# Altium PCB PCB2.PcbDoc
Units mm, origin at the board's own origin, x right, y up, seen from the top; angles counter-clockwise.
Board outline 150 x 100 mm, 2 copper layers (Top Layer, Bottom Layer); 50 components, 33 nets, 115 pads, 4 vias.
Unrouted connection lines stored in the file: 2.
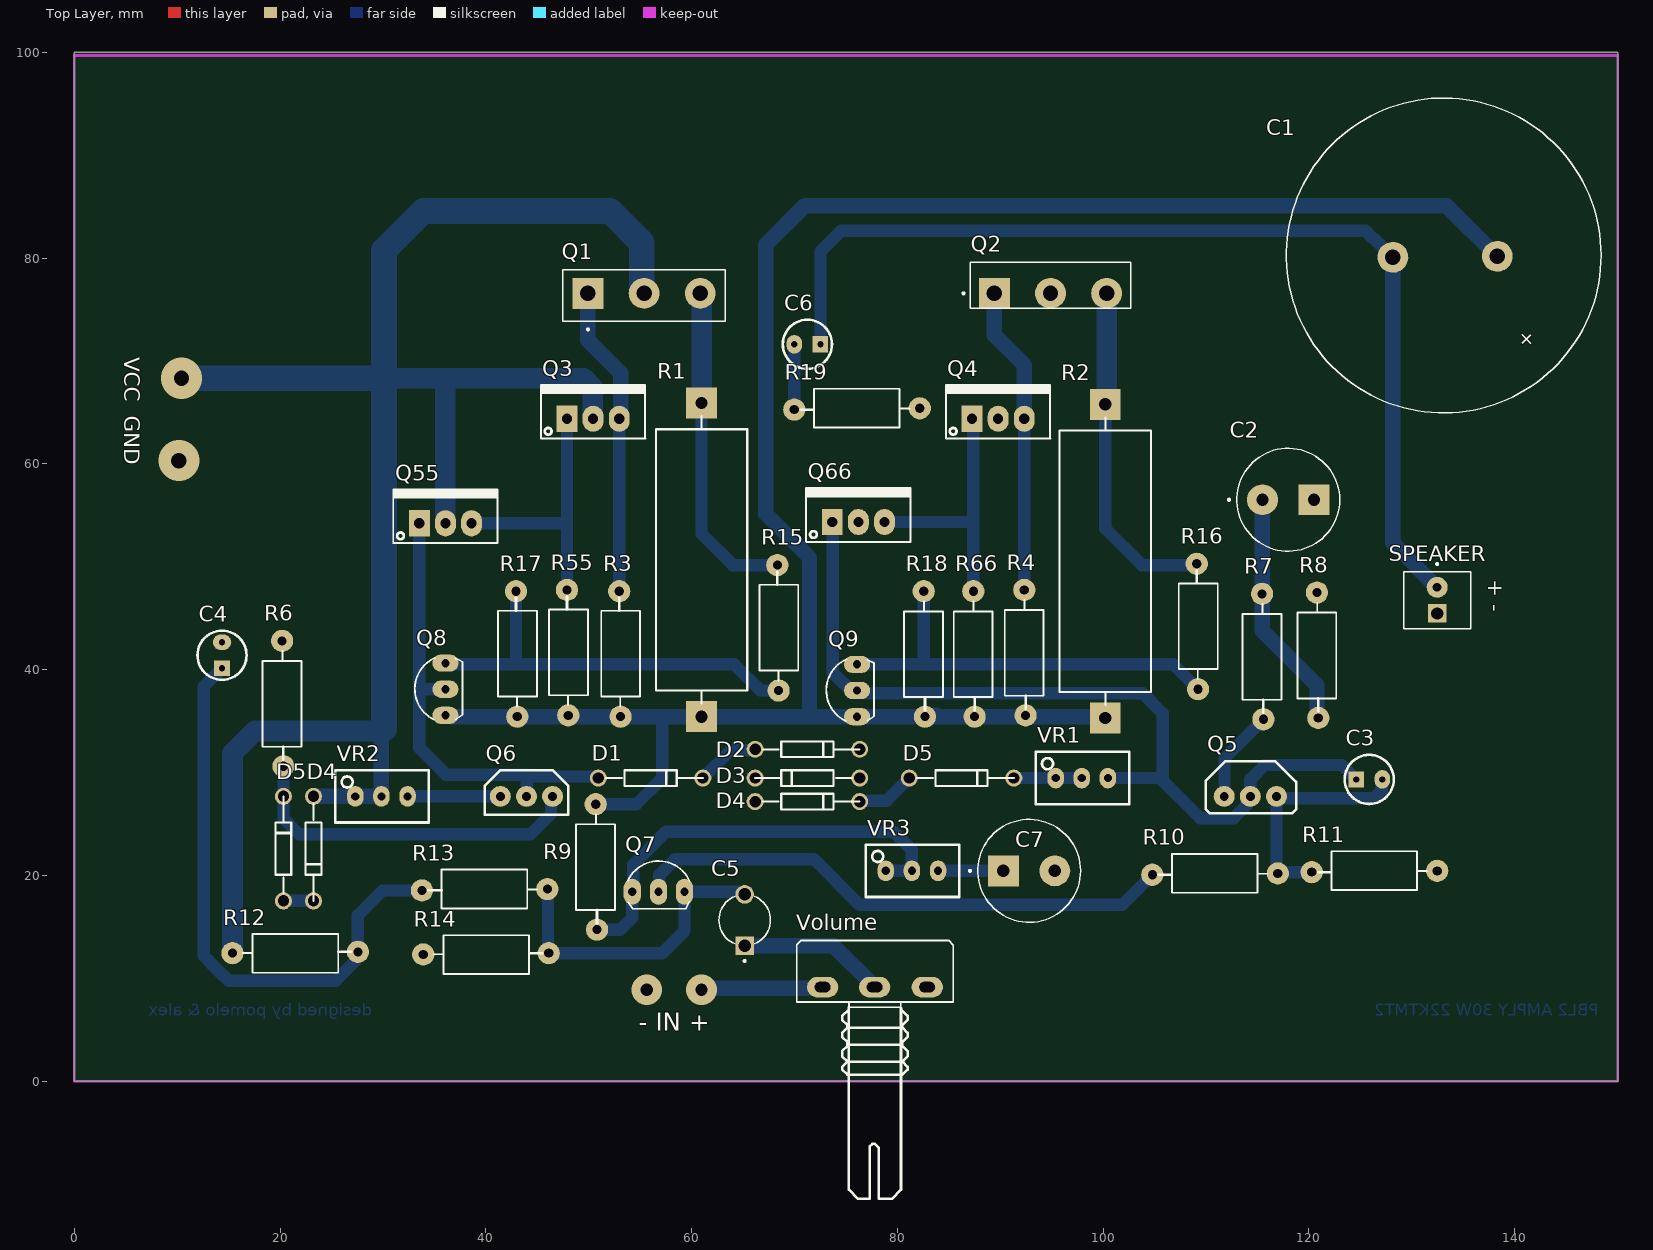
[diagram p0: Top Layer view]
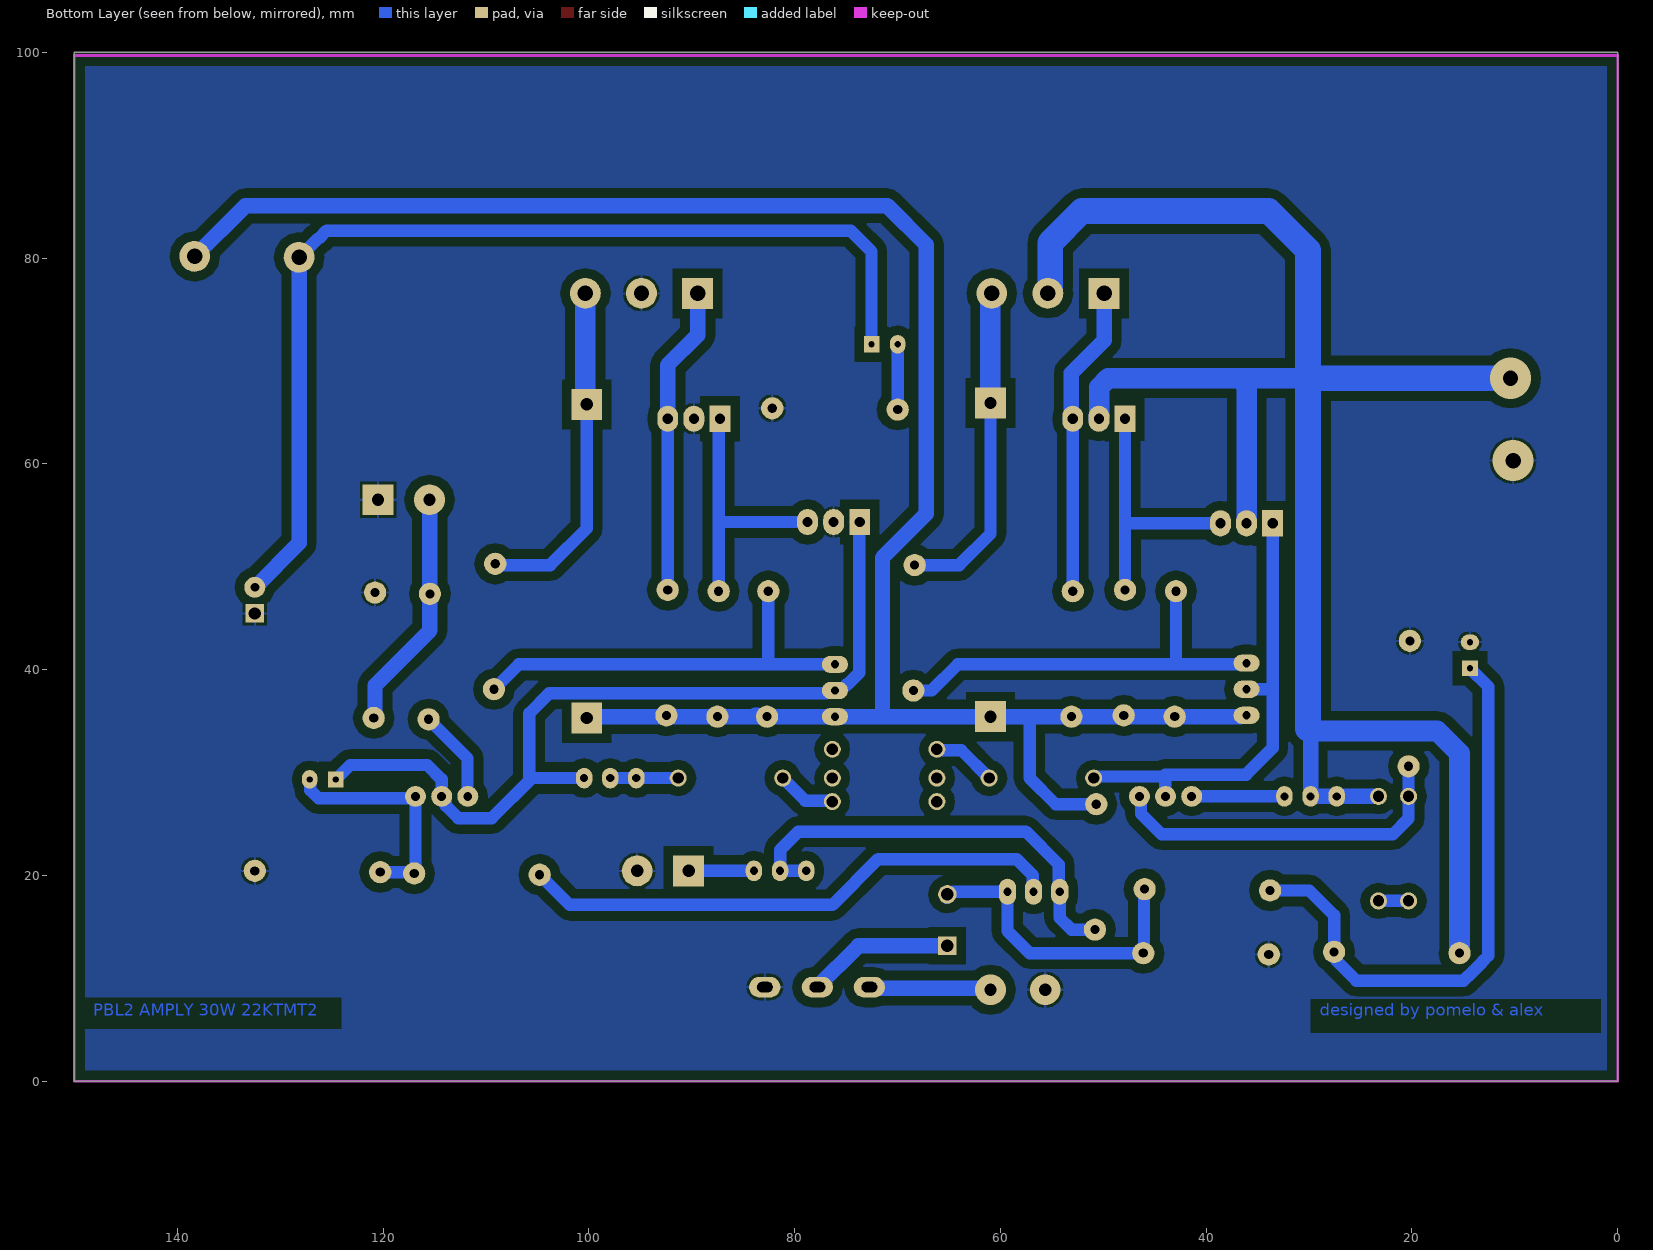
[diagram p1: Bottom Layer view, seen from below]
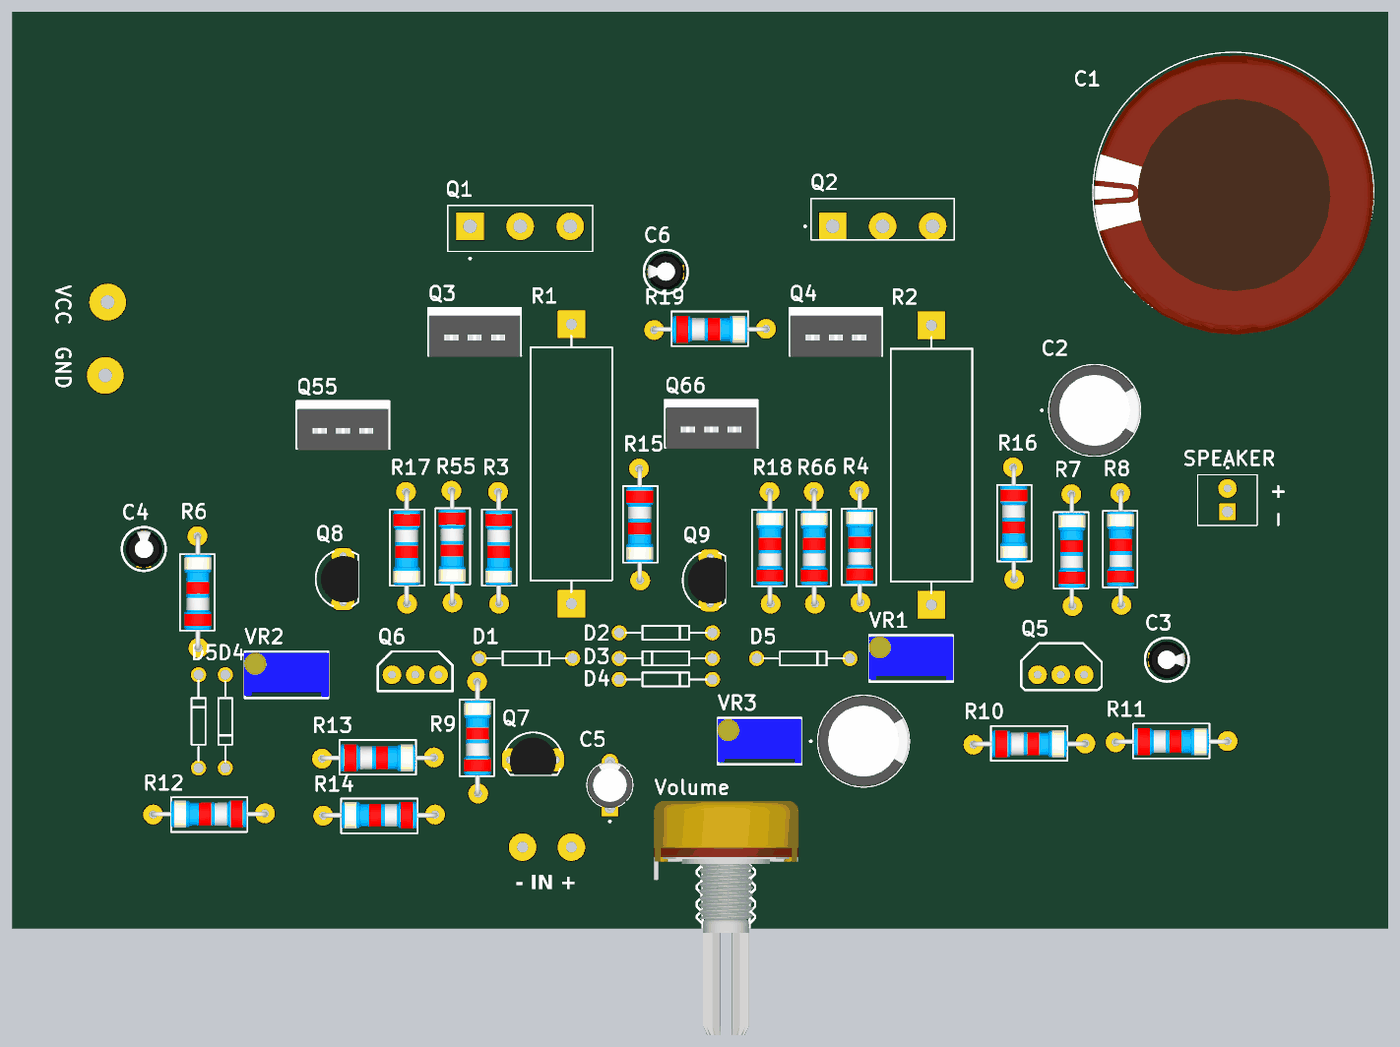
[diagram p2: 3D render of the assembled board from above, using the file's embedded part models]

## Layer stack, top to bottom
Top Solder: solder mask 0.0102, Solder Resist, Dk 3.5
Top Layer: signal copper 0.0356
Dielectric 1: dielectric 0.32, FR-4, Dk 4.8
Bottom Layer: signal copper 0.0356
Bottom Solder: solder mask 0.0102, Solder Resist, Dk 3.5

## Board outline
0,0 150,0 150,100 0,100

## Design rules (kind name [scope] priority, off if disabled: settings)
Clearance Clearance_1 [All] p1: gap=0.9 ignorepadtopadclearanceinfootprint=FALSE
PolygonConnect [All] p1: connectstyle=Relief reliefconductorwidth=0.254 reliefentries=4 polygonreliefangle="90 Angle" airgapwidth=0.254
RoutingVias [All] p1: holewidth=0.711 width=1.27 viastyle="Through Hole" minholewidth=0.711 minwidth=1.27 maxholewidth=0.711 maxwidth=1.27
SolderMaskExpansion [All] p1: expansion=0.102 istentingtop=FALSE
Width GND [InNet('GND')] p1: maxlimit=2.5 minlimit=1.5 preferedwidth=2
Width VCC [InNet('VCC')] p2: maxlimit=2.5 minlimit=1.5 preferedwidth=2
Width [All] p3: maxlimit=1.5 minlimit=0.8 preferedwidth=1.2
30 further rules are at their usual default settings.

## Components (designator, comment, footprint, x,y, rotation, side; value= is the part's Value field where it differs from the comment)
C1 "CN-ALU-DIP" CA-ALU-30 133.096,80.264 r134 top value=104 (schematic designator C?)
C2 "EEUTA1H101" CAPPRD500W60D1000H1250#1 117.983,56.515 r0 top
C3 "100p" CA-ALU-2.54 125.857,29.337 r0 top value=104
C4 "CN-ALU-DIP" CA-ALU-2.54 14.351,41.402 r90 top value=104
C5 "EEUHD1HR10B" CAPPRD500W50D500H1100 65.151,15.661 r90 top
C6 "CN-ALU-DIP" CA-ALU-2.54 71.247,71.628 r180 top value=104
C7 "EEUTA1H101" CAPPRD500W60D1000H1250#2 92.797,20.447 r0 top
D1 "DIODE" diode 56.007,29.464 r0 top
D2 "DIODE" diode 71.247,32.258 r0 top
D3 "DIODE" diode 71.247,29.464 r180 top
D4 "DIODE" diode 71.247,27.178 r0 top
D4 "DIODE" diode 23.241,22.606 r270 top
D5 "DIODE" diode 20.32,22.606 r90 top
D5 "DIODE" diode 86.233,29.464 r0 top
Q1 "2SD718" TO546P1579X502X2688-3 55.373,76.581 r0 top
Q2 "2SB688" TO545P1560X450X2320-3 89.43,76.581 r0 top
Q3 "TIP41C" TO220-123 47.879,64.389 r0 top
Q4 "TIP42C" TO220-123 87.249,64.389 r0 top
Q5 "C2383" C2383 114.3,27.686 r0 top
Q6 "A1013" A1013 43.942,27.686 r0 top
Q7 "2SA1015" TO92-123 56.769,18.415 r0 top value=A1015
Q8 "2SC1815" TO92-123 36.068,38.1 r90 top value=C1815
Q9 "2SA1015" TO92-123 76.073,37.973 r90 top value=A1015
Q55 "TIP41C" TO220-123 33.528,54.229 r0 top
Q66 "TIP42C" TO220-123 73.66,54.356 r0 top
R1 "5W Res Power" "DIEN TRO 5W" 60.96,35.433 r90 top
R2 "5W Res Power" "DIEN TRO 5W" 100.203,65.786 r270 top
R3 "220" RES-1/2W 53.086,42.037 r270 top
R4 "220" RES-1/2W 92.329,41.148 r90 top
R6 "Res" RES-1/2W 20.193,36.195 r90 top
R7 "62" RES-1/2W 115.443,40.767 r90 top
R8 "100" RES-1/2W 120.777,40.894 r90 top
R9 "3k" RES-1/2W 50.673,20.32 r90 top
R10 "Res" RES-1/2W 110.363,20.193 r0 top
R11 "Res" RES-1/2W 125.857,20.447 r0 top
R12 "560k" RES-1/2W 21.971,12.446 r180 top
R13 "220k" RES-1/2W 39.37,18.669 r0 top
R14 "560k" RES-1/2W 40.513,12.319 r180 top
R15 "2k" RES-1/2W 68.453,44.577 r270 top
R16 "2k" RES-1/2W 109.22,44.704 r270 top
R17 "2k" RES-1/2W 43.053,42.037 r270 top
R18 "2k" RES-1/2W 82.55,41.021 r90 top
R19 "Res" RES-1/2W 75.565,65.405 r0 top
R55 "220" RES-1/2W 48.006,42.164 r270 top
R66 "220" RES-1/2W 87.376,41.021 r90 top
SPEAKER "282834-2" TE_282834-2 132.461,46.736 r270 top
Volume "1k" VR-S1 77.81,9.144 r0 top value="Volume 50k"
VR1 "50" RVAR10K 97.917,29.464 r0 top value="VR 10K"
VR2 "200" RVAR10K 29.845,27.686 r0 top value="VR 10K"
VR3 "50" RVAR10K 81.407,20.447 r0 top value="VR 10K" (schematic designator VR?)

## Footprints (in the part's own frame and the unit in brackets; to place one, negate y for a bottom-side part, rotate by r counter-clockwise, add the part's x,y. Pads: shape width x height; smd on the part's side, far side on the other; paste and mask are expansions set on the pad)
A1013 [mil]
  round 80 hole 34: 1(-100,0) 2(0,0) 3(100,0)
  silkscreen extent -160,-70 160,100
C2383 [mil]
  round 80 hole 34: 1(-100,0) 2(0,0) 3(100,0)
  silkscreen extent -170,-65 175,135
CA-ALU-2.54 [mm]
  rect 1.5x1.58 hole 0.6: 1(-1.27,0)
  oval 1.5x1.8 hole 0.6: 2(1.27,0)
  silkscreen extent -2.39,-2.39 2.39,2.39, body extent -2,-2.03 1.99,1.97, height 7.01
CA-ALU-30 [mm] "Polarized capacitors, Aluminum Electrolytic Capacitors, 2-Leads, Body 22x41x10x0.8"
  round 3 hole 1.5: 1(-3.683,-3.683) 2(3.302,3.683)
  silkscreen extent -15.3,-15.3 15.3,15.3, body extent -21.81,-21.43 21.3,21.68, height 5.59
CAPPRD500W50D500H1100 [mm]
  round 1.8 hole 1.2: N(2.5,0)
  rect 1.8x1.8 / inner round 1.8 / far side rect 1.8x1.8 hole 1.2: P(-2.5,0)
  silkscreen extent -4.06,-2.5 2.32,2.5, body extent -2.75,-2.5 2.75,2.5, height 11
CAPPRD500W60D1000H1250#1 [mm]
  rect 3x3 hole 1.2: N(2.5,0)
  round 3 hole 1.2: P(-2.5,0)
  silkscreen extent -5.85,-5 5,5, body extent -5,-5 5,5, height 12.5
CAPPRD500W60D1000H1250#2 [mm]
  round 3 hole 1.2 mask-2539.97: N(2.5,0)
  rect 3x3 hole 1.2: P(-2.5,0)
  silkscreen extent -5.85,-5 5,5, body extent -5,-5 5,5, height 12.5
"DIEN TRO 5W" [mm]
  rect 3x3 hole 1.2: 1(0,0) 2(30.48,0)
  silkscreen extent 1.27,-4.44 29.21,4.45, body extent 2.54,-4.44 27.94,4.45, height 7.62
diode [mil] "Diode"
  round 65 hole 43.31: 1(-200,0) 2(200,0)
  silkscreen extent -170,-30 200,30
RES-1/2W [mil]
  round 85 hole 35: 1(-220,-5) 2(260,0)
  silkscreen extent -195,-74 221,75, body extent -230,-60 270,56, height 121
RVAR10K [mm] "Bien tro vi chinh"
  oval 1.6x2 hole 0.8: 1(-2.54,0) 2(0,0) 3(2.54,0)
  silkscreen extent -4.47,-2.54 4.6,2.54, body extent -4.54,-2.4 4.66,2.4, height 12.02
TE_282834-2 [mm]
  round 2.032 hole 0.864: 1(-1.27,0)
  rect 1.8x1.8 / inner round 1.8 / far side rect 1.8x1.8 hole 1.2: 2(1.27,0)
  silkscreen extent -3.62,-3.25 2.77,3.25
TO92-123 [mil] "TO-92"
  oval 66x100 hole 32: 1(-100,0) 2(0,0) 3(100,0)
  silkscreen extent -117,-65 120,118, body extent -109,-66 109,95, height 245
TO220-123 [mil] "TO-220 - 1-2-3"
  rect 80x100 hole 39: 1(0,0)
  oval 80x100 hole 39: 2(100,0) 3(200,0)
  silkscreen extent -100,-76 300,130, body extent -95,-80 295,97, height 323
TO545P1560X450X2320-3 [mm]
  rect 3x3 hole 1.5: 1(0,0)
  round 3 hole 1.5: 2(5.45,0) 3(10.9,0)
  silkscreen extent -3.1,-1.47 13.25,3.03
TO546P1579X502X2688-3 [mm]
  rect 3x3 hole 1.5: 1(-5.46,0)
  round 3 hole 1.5: 2(0,0) 3(5.46,0)
  silkscreen extent -7.9,-3.6 7.9,2.29
VR-S1 [mil]
  oval 120x78.74 hole 40 slot 60 at 0 deg: 1(-200,0) 2(-1,0) 3(200,0)
  silkscreen extent -299,-810 300,179, body extent -310,-818 310,188, height 839

## Part data
C1 C4 C6: "Capacitor (Semiconductor SIM Model)", LatestRevisionDate=17-Jul-2002, LatestRevisionNote="Re-released for DXP Platform.", PackageReference=C1206, Publisher="Altium Limited"
C2 C7: "Cap Aluminum Lytic 100uF 50V 20% (10 X 12.5mm) Radial 5mm 555mA 2000h 125Â°C Automotive Bulk", Package="RADIAL-2 Panasonic", Check_prices=https://www.snapeda.com/parts/EEUTA1H101/Panasonic/view-part/2305858/?ref=eda, Digi-Key_Part_Number=10-EEU-TA1H101BCT-ND, MF=Panasonic, MP=EEUTA1H101, SnapEDA_Link=https://www.snapeda.com/parts/EEUTA1H101/Panasonic/view-part/2305858/?ref=snap
C3: library part CN-ALU-DIP, "Capacitor (Semiconductor SIM Model)", LatestRevisionDate=17-Jul-2002, LatestRevisionNote="Re-released for DXP Platform.", PackageReference=C1206, Publisher="Altium Limited"
C5: "CAP ALUM 0.1UF 20% 50V RADIAL", Package="RADIAL-2 Panasonic", Availability="In Stock", Check_prices=https://www.snapeda.com/parts/EEUHD1HR10B/Panasonic/view-part/5793058/?ref=eda, MF=Panasonic, MP=EEUHD1HR10B, Price=None, SnapEDA_Link=https://www.snapeda.com/parts/EEUHD1HR10B/Panasonic/view-part/5793058/?ref=snap
D1 D2 D3 D4 D4 D5 D5: "Diode"
Q1: "Position Header Spacer Connector", Package=None, Availability="Not in stock", Check_prices=https://www.snapeda.com/parts/2SD718/Toshiba/view-part/?ref=eda, MF=Toshiba, MP=2SD718, Price=None, SnapEDA_Link=https://www.snapeda.com/parts/2SD718/Toshiba/view-part/?ref=snap
Q2: "Bipolar Transistors - BJT Pb TO3PI PLS PLN-N,DISCON(01-12)/PHASE-OUT(05-07)/OBSOLETE(07-10),", Package=None, Availability=Unavailable, Check_prices=https://www.snapeda.com/parts/2SB688/Inchange%20Semiconductor/view-part/583109/?ref=eda, MF="Inchange Semiconductor", MP=2SB688, Price=None, SnapEDA_Link=https://www.snapeda.com/parts/2SB688/Inchange%20Semiconductor/view-part/583109/?ref=snap
Q3 Q55: "NPN 2W, BCE"
Q4 Q66: "PNP 2W, BCE"
Q5: library part "TRAN C2383"
Q7 Q9: "PNP 600mW, ECB"
Q8: "NPN 600mW, ECB"
R1 R2: library part "Res 5W", Creator="Nguyen Ba Bien"
R3 R4 R7 R8 R9 R12 R13 R14 R15 R16 R17 R18 R55 R66: library part Res, "Res", Manufacturer="Generic Components", Class=Passive, Published=08/06/2000, Publisher="Altium Hobart Technology Centre", SubClass=R
R6 R10 R11 R19: Manufacturer="Generic Components", Class=Passive, Published=08/06/2000, Publisher="Altium Hobart Technology Centre", SubClass=R
SPEAKER: Package=None, Availability=Unavailable, MF="{'manufacturer': u'TE Connectivity'}", MP=282834-2, Price=None
Volume: library part VR-S, "Var Resistor"
VR1 VR2 VR3: library part "Var Resitor", "Var Resistor"

## Via types
v1: diameter 3, hole 1.2, Top Layer to Bottom Layer, 2 vias
v2: diameter 4, hole 1.5, Top Layer to Bottom Layer, 2 vias

## Nets (pads, with @x,y where several pads share a name; then routed paths per layer and width w, separated by ;. In a path a pad name is that pad's centre, name@x,y a point inside that pad or via, vN(x,y) a via of type N, cw(c..) or ccw(c..) an arc to the next point about the centre after c; other vN are vias at no path point)
GND: C2.N C4.2 C7.N Q2.2 Q4.2 Q66.2 R6.2 R8.2 R11.2 R14.2 R19.2 SPEAKER.2 Volume.3
  other v1: 55.634,8.889
  other v2: 10.16,60.325
NetC2_P: C2.P R7.2 R8.1 | length 24
  Bottom Layer w1.2: C2.P C2.P@115.827,56.171
  Bottom Layer w1.5: C2.P 115.463,56.495 115.463,47.391 R7.2 115.443,43.815 120.777,38.481 120.777,37.846 120.778,37.845 120.778,35.432 R8.1
NetC3_1: C3.1 Q5.2 Q9.2 Q66.1 VR1.3 | length 84.4
  Bottom Layer w1.2: Q66.1@74.041,54.356 73.703,54.018 73.703,39.71 74.838,38.575 74.91,38.575 75.512,37.973 76.634,37.973 76.891,37.716 103.828,37.716 105.791,35.753 105.791,29.464 VR1.3 ; 105.537,29.464 109.431,25.57 112.69,25.57 113.907,26.787 113.907,27.067 114.141,27.302 Q5.2@114.173,27.302 ; Q5.2 114.3,29.337 115.697,30.734 123.19,30.734 124.397,29.527 124.437,29.527 124.587,29.377 C3.1
NetC3_2: C3.2 Q5.3 R10.2 R11.1 | length 22.3
  Bottom Layer w1.2: Q5.3 116.84,20.447 116.967,20.32 R11.1 ; Q5.3@116.865,27.527 117.588,27.527 117.613,27.502 126.274,27.502 127.07,28.297 127.07,29.28 C3.2
NetC4_1: C4.1 R12.1 R13.1 | length 57
  Bottom Layer w1.2: C4.1 12.573,38.354 12.573,12.192 13.187,11.578 13.187,11.543 14.464,10.266 14.499,10.266 14.986,9.779 25.4,9.779 27.376,11.755 27.376,12.39 R12.1 27.559,16.129 29.972,18.542 R13.1
NetC5_N: C5.N Q7.3 R13.2 R14.1 | length 30.1
  Bottom Layer w1.2: R13.2@45.974,18.661 R13.2 46.038,18.605 R14.1@46.038,12.636 ; R14.1 57.15,12.446 59.309,14.605 Q7.3 64.608,18.415 C5.N@65.185,17.838
NetC5_P: C5.P Volume.2 | length 14.8
  Bottom Layer w1.5: C5.P 73.793,13.161 77.81,9.144 Volume.2@78.334,9.144
NetC6_1: C1.2 C6.1 SPEAKER.1 | length 100.4
  Bottom Layer w1.2: C6.1 72.517,80.648 74.546,82.677 125.476,82.677 126.238,81.915 126.319,81.915 C1.2
  Bottom Layer w1.5: C1.2 128.153,52.314 SPEAKER.1
NetC6_2: C6.2 R19.1 | length 6.3
  Bottom Layer w1.2: R19.1 C6.2
NetC7_P: C7.P VR3.3 | length 6.3
  Bottom Layer w1.2: VR3.3 C7.P
NetC?_1: C1.1 Q8.1 Q9.1 R1.1 R2.2 R3.2 R4.1 R9.2 R17.2 R18.1 R55.2 R66.1 | length 199.5
  Bottom Layer w1.2: R9.2 54.61,26.924 57.152,29.466 57.152,35.052
  Bottom Layer w1.5: Q8.1@36.195,35.479 36.243,35.526 36.581,35.526 36.675,35.433 R17.2 48.006,35.433 R3.2 57.152,35.433 R1.1 ; R1.1@61.214,35.433 71.453,35.433 ; 83.82,35.433 R66.1 92.456,35.433 99.695,35.433 100.013,35.115 R2.2 ; 83.82,35.56 83.642,35.56 83.515,35.433 R18.1 Q9.1 71.453,35.433 ; C1.1 133.387,85.09 70.99,85.09 67.183,81.283 67.183,55.168 71.453,50.898 71.453,35.433
NetD1_1: D1.1 Q6.2 Q8.2 Q55.1 | length 45
  Bottom Layer w1.2: 33.528,40.007 Q55.1 ; 33.53,40.005 33.53,38.1 ; Q8.2 33.53,38.1 ; Q6.2@43.963,27.707 43.963,29.612 ; D1.1 50.841,29.55 50.522,29.55 50.46,29.612 43.963,29.612 ; 33.53,38.1 33.53,32.383 36.111,29.802 43.963,29.802 43.963,29.612
NetD1_2: D1.2 D2.1 | length 6.2
  Bottom Layer w1.2: D1.2 63.795,32.172 66.081,32.172 D2.1
NetD2_2: D2.2 D3.1
NetD3_2: D3.2 D4.1@66.167,27.178
NetD4_2: D4.2@76.327,27.178 D5.1@81.153,29.464 | length 5.8
  Bottom Layer w1.2: D4.2@76.327,27.178 76.413,27.264 78.953,27.264 D5.1@81.153,29.464
NetD4_2: D4.2@23.241,17.526 D5.1@20.32,17.526 | length 2.9
  Bottom Layer w1.2: D5.1@20.32,17.526 D4.2@23.241,17.526
NetD5_2: D5.2@20.32,27.686 Q6.3 R6.1 | length 33.9
  Bottom Layer w1.2: R6.1 20.32,27.686 20.32,25.527 21.844,24.003 44.324,24.003 46.323,26.002 46.323,27.146 Q6.3@46.482,27.305
NetD5_2: D5.2@91.313,29.464 VR1.1 VR1.2 | length 6.6
  Bottom Layer w1.2: D5.2@91.313,29.464 VR1.1 VR1.2
NetQ1_1: Q1.1 Q3.3 R3.1 | length 29.7
  Bottom Layer w1.2: R3.1 Q3.3
  Bottom Layer w1.5: Q1.1 49.913,72.007 53.086,68.834 Q3.3@53.086,65.151 ; Q3.3@53.085,64.509 Q3.3@53.205,64.389
NetQ1_3: Q1.3 R1.2 R15.1 | length 32
  Bottom Layer w1.2: R1.2 60.96,53.213 64.008,50.165 R15.1
  Bottom Layer w2: R1.2 Q1.3@60.96,76.581
NetQ2_1: Q2.1 Q4.3 R4.2 | length 30
  Bottom Layer w1.2: R4.2 Q4.3
  Bottom Layer w1.5: Q2.1 89.408,76.559 89.408,72.517 92.329,69.596 Q4.3
NetQ2_3: Q2.3 R2.1 R16.1 | length 32.9
  Bottom Layer w1.2: R2.1 100.203,53.721 103.759,50.165 R16.1@108.729,50.165
  Bottom Layer w1.5: R2.1 R2.1@100.33,65.913
  Bottom Layer w2: R2.1@100.33,65.913 Q2.3
NetQ3_1: Q3.1 Q55.3 R55.1 | length 25.9
  Bottom Layer w1.2: Q55.3 47.879,54.229 ; R55.1 47.879,54.229 ; Q3.1 47.879,54.229
NetQ4_1: Q4.1 Q66.3 R66.2 | length 25.4
  Bottom Layer w1.2: Q66.3 87.376,54.356 ; Q4.1 87.376,64.262 87.376,54.356 ; R66.2@87.376,47.713 87.376,54.356
NetQ5_1: Q5.1 R7.1 | length 9.1
  Bottom Layer w1.2: Q5.1 111.784,27.71 111.784,31.393 R7.1
NetQ6_1: Q6.1 VR2.3 | length 9
  Bottom Layer w1.2: VR2.3 Q6.1
NetQ7_1: Q7.1 R9.1 VR3.1 VR3.2 | length 42.8
  Bottom Layer w1.2: R9.1 53.086,14.732 54.229,15.875 Q7.1 54.32,18.506 54.32,21.06 57.517,24.257 79.629,24.257 81.407,22.479 VR3.2 VR3.1
NetQ7_2: Q7.2 R10.1 | length 53.3
  Bottom Layer w1.2: Q7.2 56.86,18.506 56.86,20.03 58.42,21.59 71.882,21.59 76.327,17.145 101.854,17.145 R10.1
NetQ8_3: Q8.3 R15.2 R17.1 | length 40.2
  Bottom Layer w1.2: Q8.3@36.068,40.513 42.926,40.513 ; R17.1@42.926,47.247 42.926,40.513 ; R15.2 66.675,37.973 64.135,40.513 42.926,40.513
NetQ9_3: Q9.3 R16.2 R18.2 | length 41.3
  Bottom Layer w1.2: Q9.3 82.55,40.513 ; R18.2 82.55,40.513 ; R16.2 106.807,40.513 82.55,40.513
NetVolume_1: Volume.1 | length 12.4
  Bottom Layer w1.5: v1(60.96,8.89) 61.118,9.048 73.183,9.048 Volume.1@73.279,9.144
VCC: D4.1@23.241,27.686 Q1.2 Q3.2 Q55.2 R12.2 VR2.1 VR2.2 | length 185.3
  Bottom Layer w1.5: D4.1@23.241,27.686 VR2.1 VR2.2 29.845,34.036
  Bottom Layer w2: R12.2 15.367,31.877 17.526,34.036 29.845,34.036 30.099,34.036 ; 30.099,68.326 36.044,68.326 36.776,68.326 ; Q55.2 36.068,54.492 36.044,54.516 36.044,67.594 36.776,68.326 ; Q3.2 50.419,64.652 50.395,64.676 50.395,67.461 49.53,68.326 36.776,68.326
  Bottom Layer w2.5: v2(10.414,68.326) 30.099,68.326 ; 30.099,34.246 30.099,68.326 ; Q1.2 55.277,76.677 55.277,77.03 55.15,77.157 55.15,81.502 52.07,84.582 33.909,84.582 30.099,80.772 30.099,68.326

## Polygon pours and split planes (outlines as drawn)
GND on Bottom Layer "NONET_L02_P-001" (solid, pour order 0): 0,99.949 0.254,99.949 149.86,99.822 149.86,0.254 0,0.254

## Keep-outs
Keep-Out Layer:
  lines w0.254: 0,0 0,99.695 150,99.695 150,0 0,0

## Other copper
Bottom Layer:
  text "PBL2 AMPLY 30W 22KTMT2" at 148.155,5.991 h2
  text "designed by pomelo & alex" at 28.944,5.956 h2

## Silkscreen, mask and mechanical layers (free items; w line width, h text height)
Top Overlay:
  text "VCC  GND" at 4.826,70.358 h1.52 r270
  text "+ -" at 137.414,48.768 h1.52 r270
  text "- IN +" at 54.867,4.318 h3

## Text inside footprints (layer, text, board x,y; h text height)
C1: Top Overlay "+" at 142.188,71.91 h1.5 r134